# EAGLE board SparkFun_QRE1113_Line_Sensor_Breakout_Digital_Panel_v12 (EAGLE 7.5.0), part 1 of 3
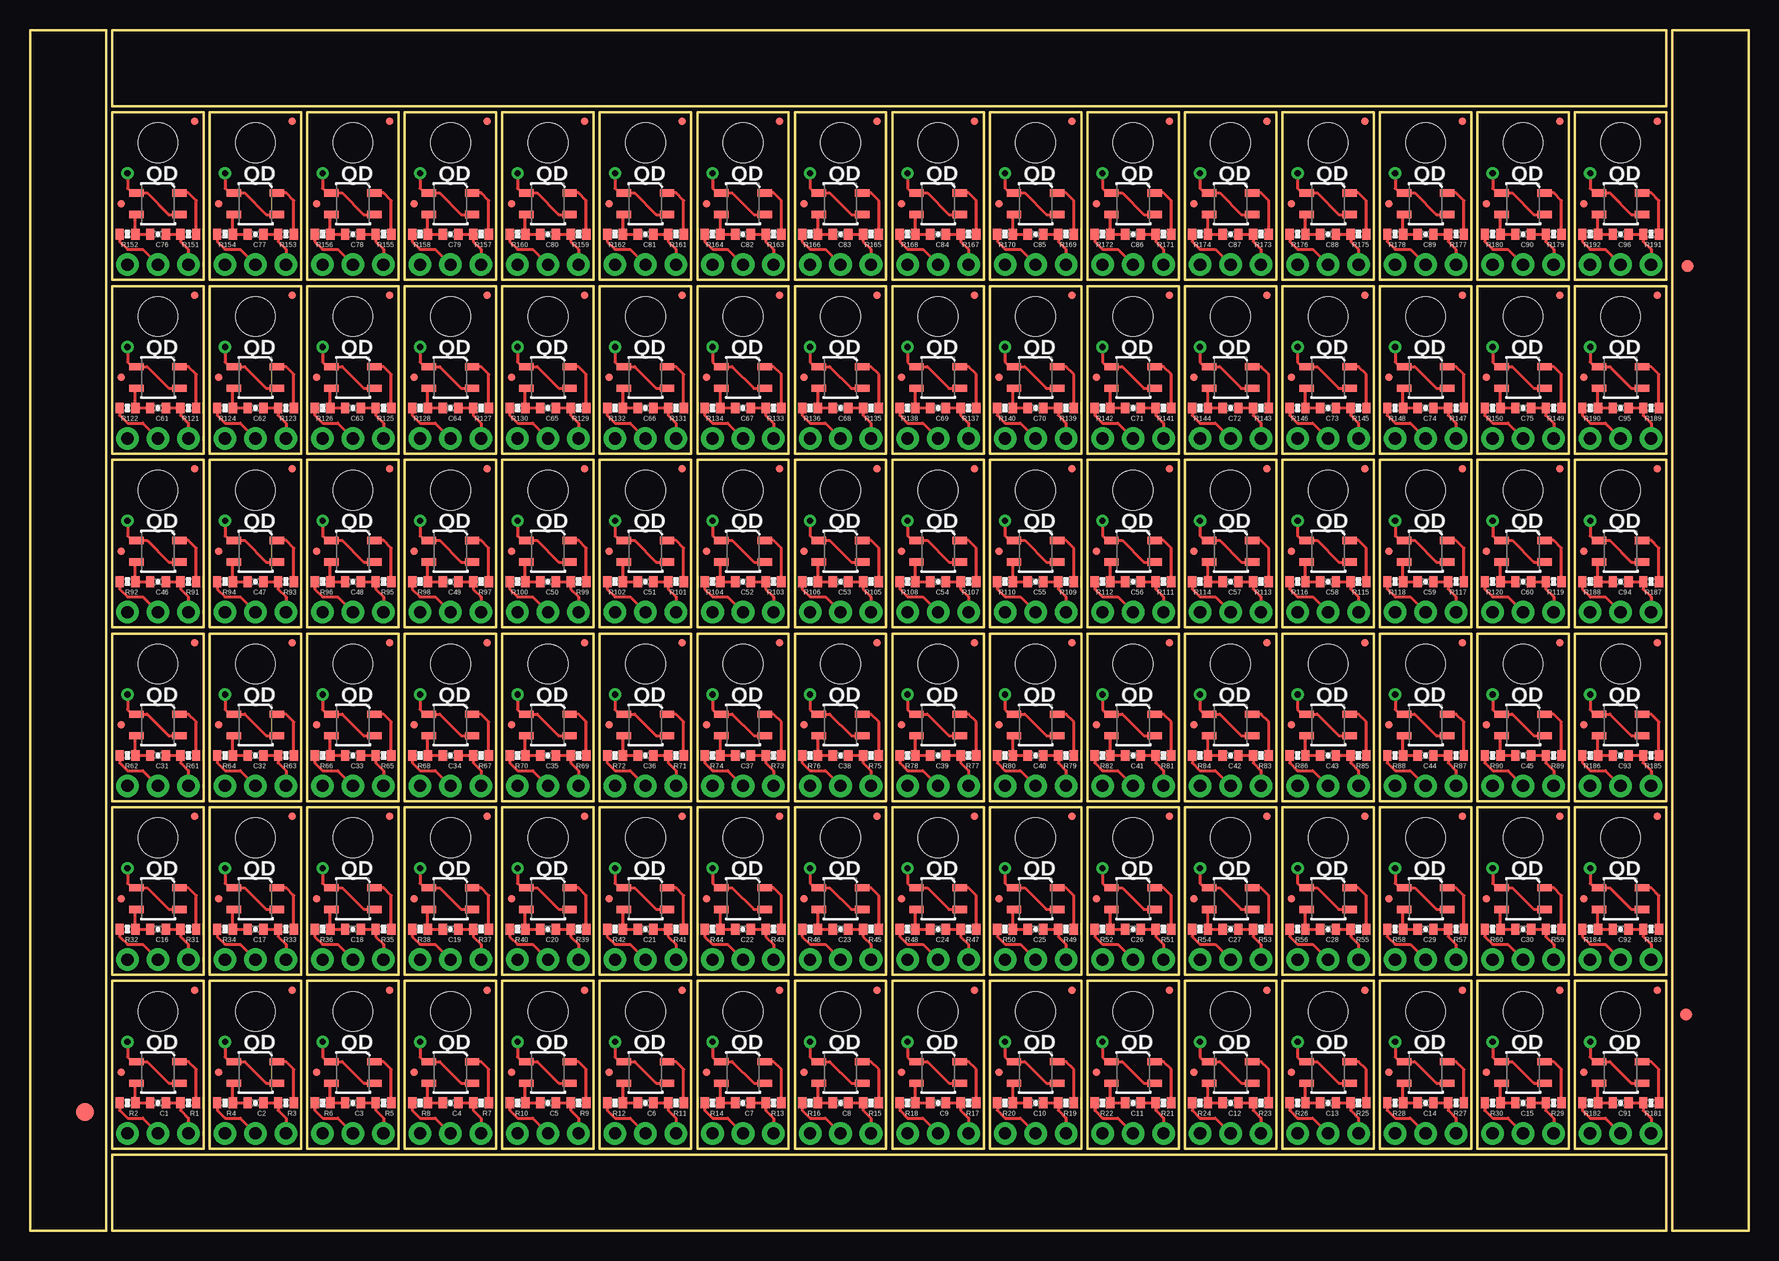
[diagram p0: board, top side]
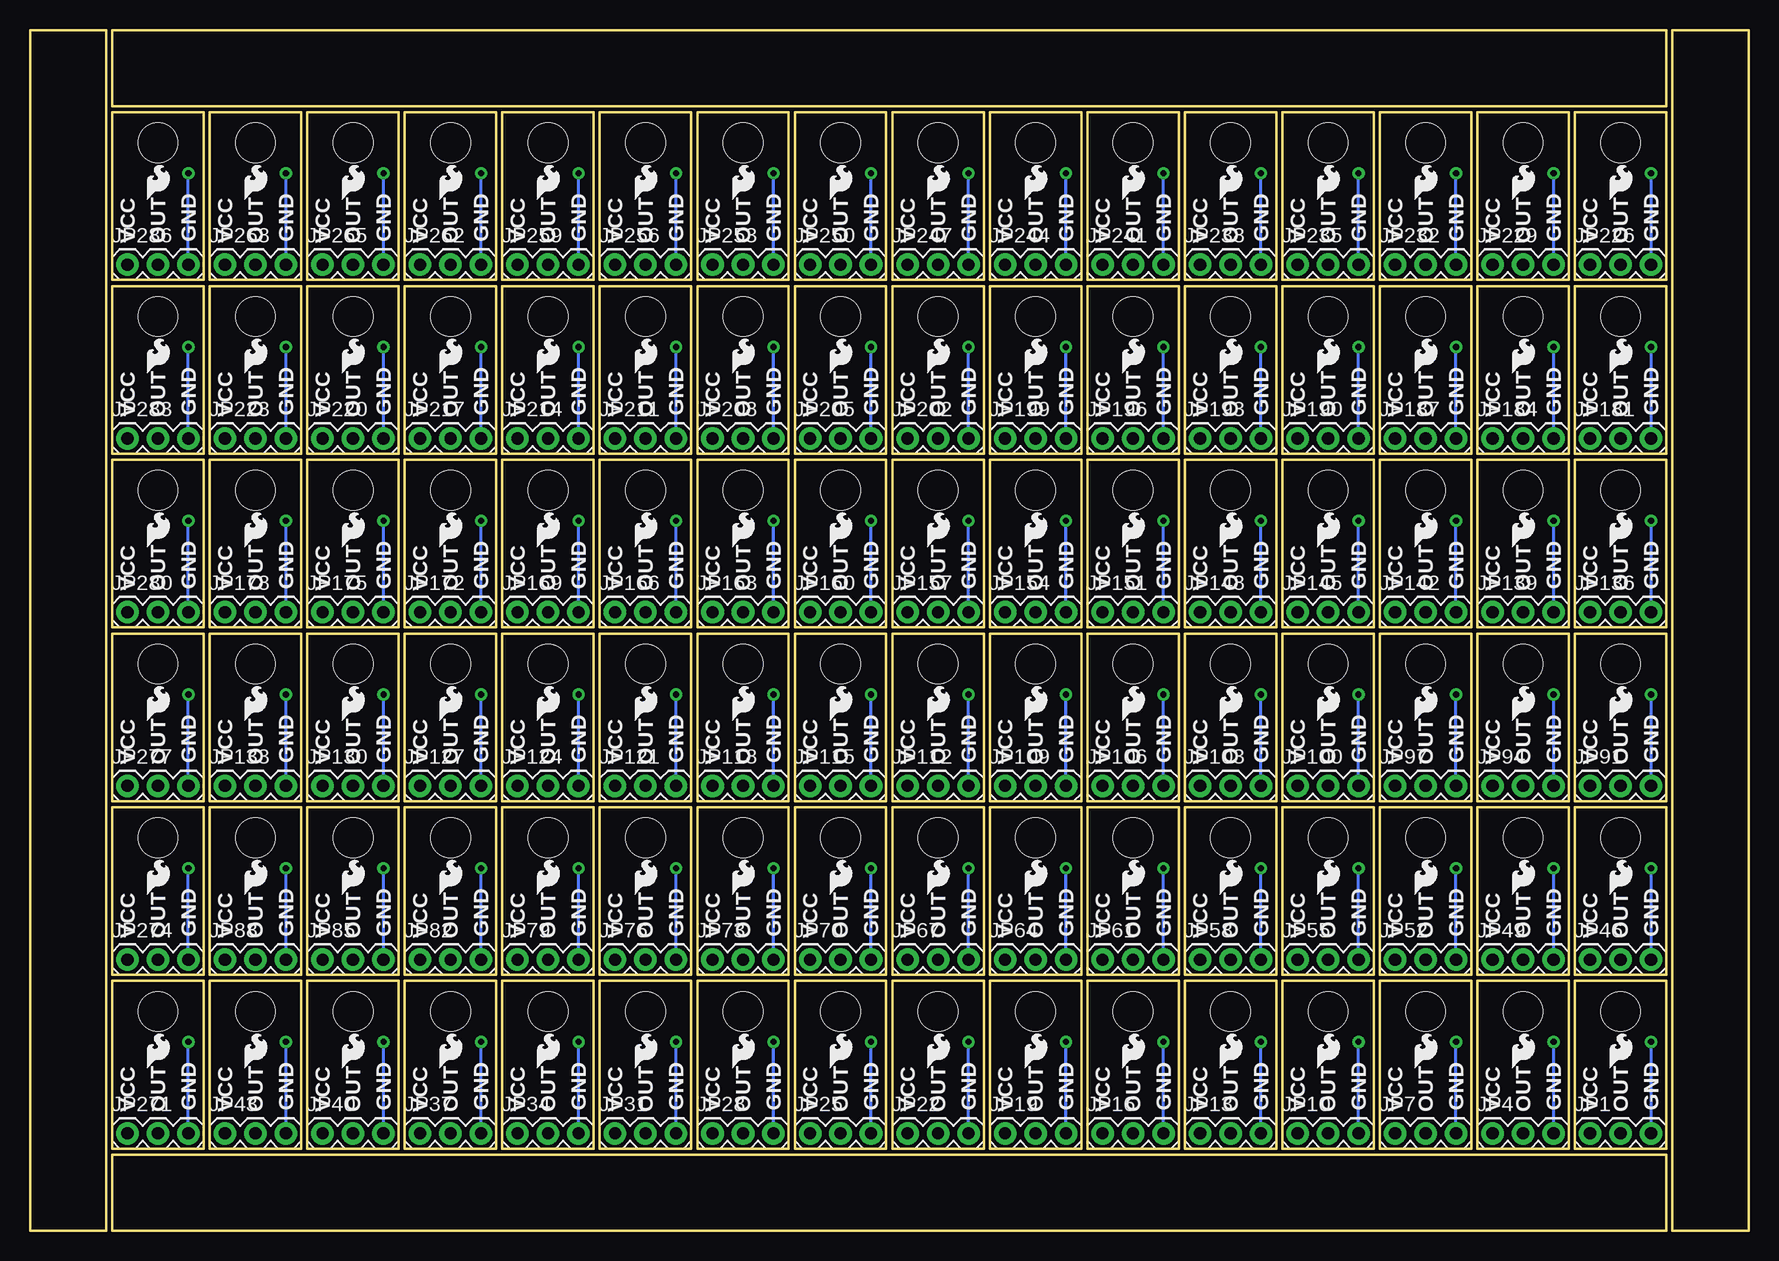
[diagram p1: board, bottom side, seen from below]

Size 143.26 x 100.08 mm. Coordinates in mm from the lower left corner, seen from the top.
Outline: 408 segments
Copper layers (1*16): Top 0.035mm / dielectric 1.5mm / Bottom 0.035mm
Design rules "SparkFun": minimum track width 8mil, minimum drill 20mil, track to track 8mil, track to pad 8mil, pad to pad 8mil, via to via 8mil, smd to smd 8mil, copper to edge 9mil, drill to drill 8mil, minimum pad ring 12mil, minimum via ring 10mil, stop-mask expansion 4mil, vias tented up to drill 20mil, thermal gap 10mil

## Footprints (pad centres in the part's own frame; a part is rotated, then mirrored left to right if it is on the bottom)
0402-CAP = smd 0.7 x 0.9: 1 -0.65,0; 2 0.65,0
FIDUCIAL-1.5X3 = smd 1.5 x 1.5: 1 0,0
FIDUCIAL-1X2 = smd 1 x 1: 1 0,0
MICRO-FIDUCIAL = smd 0.635 x 0.635: 1 0,0
1X03 = drill 1.016 pad 1.88: 1 0,0; 2 2.54,0; 3 5.08,0
STAND-OFF = hole 3.302: 0,0
0402-RES = smd 0.7 x 0.9: 1 -0.65,0; 2 0.65,0
QRE1113 = smd 1.2 x 0.6: 1 -1.8,-0.9; 2 1.8,-0.9; 3 1.8,0.9; 4 -1.8,0.9

## Placement (x,y rotation side)
C1  10nF  [0402-CAP]  10.67,10.67 180 top
C2  10nF  [0402-CAP]  18.8,10.67 180 top
C3  10nF  [0402-CAP]  26.92,10.67 180 top
C4  10nF  [0402-CAP]  35.05,10.67 180 top
C5  10nF  [0402-CAP]  43.18,10.67 180 top
C6  10nF  [0402-CAP]  51.31,10.67 180 top
C7  10nF  [0402-CAP]  59.44,10.67 180 top
C8  10nF  [0402-CAP]  67.56,10.67 180 top
C9  10nF  [0402-CAP]  75.69,10.67 180 top
C10  10nF  [0402-CAP]  83.82,10.67 180 top
C11  10nF  [0402-CAP]  91.95,10.67 180 top
C12  10nF  [0402-CAP]  100.08,10.67 180 top
C13  10nF  [0402-CAP]  108.2,10.67 180 top
C14  10nF  [0402-CAP]  116.33,10.67 180 top
C15  10nF  [0402-CAP]  124.46,10.67 180 top
C16  10nF  [0402-CAP]  10.67,25.15 180 top
C17  10nF  [0402-CAP]  18.8,25.15 180 top
C18  10nF  [0402-CAP]  26.92,25.15 180 top
C19  10nF  [0402-CAP]  35.05,25.15 180 top
C20  10nF  [0402-CAP]  43.18,25.15 180 top
C21  10nF  [0402-CAP]  51.31,25.15 180 top
C22  10nF  [0402-CAP]  59.44,25.15 180 top
C23  10nF  [0402-CAP]  67.56,25.15 180 top
C24  10nF  [0402-CAP]  75.69,25.15 180 top
C25  10nF  [0402-CAP]  83.82,25.15 180 top
C26  10nF  [0402-CAP]  91.95,25.15 180 top
C27  10nF  [0402-CAP]  100.08,25.15 180 top
C28  10nF  [0402-CAP]  108.2,25.15 180 top
C29  10nF  [0402-CAP]  116.33,25.15 180 top
C30  10nF  [0402-CAP]  124.46,25.15 180 top
C31  10nF  [0402-CAP]  10.67,39.62 180 top
C32  10nF  [0402-CAP]  18.8,39.62 180 top
C33  10nF  [0402-CAP]  26.92,39.62 180 top
C34  10nF  [0402-CAP]  35.05,39.62 180 top
C35  10nF  [0402-CAP]  43.18,39.62 180 top
C36  10nF  [0402-CAP]  51.31,39.62 180 top
C37  10nF  [0402-CAP]  59.44,39.62 180 top
C38  10nF  [0402-CAP]  67.56,39.62 180 top
C39  10nF  [0402-CAP]  75.69,39.62 180 top
C40  10nF  [0402-CAP]  83.82,39.62 180 top
C41  10nF  [0402-CAP]  91.95,39.62 180 top
C42  10nF  [0402-CAP]  100.08,39.62 180 top
C43  10nF  [0402-CAP]  108.2,39.62 180 top
C44  10nF  [0402-CAP]  116.33,39.62 180 top
C45  10nF  [0402-CAP]  124.46,39.62 180 top
C46  10nF  [0402-CAP]  10.67,54.1 180 top
C47  10nF  [0402-CAP]  18.8,54.1 180 top
C48  10nF  [0402-CAP]  26.92,54.1 180 top
C49  10nF  [0402-CAP]  35.05,54.1 180 top
C50  10nF  [0402-CAP]  43.18,54.1 180 top
C51  10nF  [0402-CAP]  51.31,54.1 180 top
C52  10nF  [0402-CAP]  59.44,54.1 180 top
C53  10nF  [0402-CAP]  67.56,54.1 180 top
C54  10nF  [0402-CAP]  75.69,54.1 180 top
C55  10nF  [0402-CAP]  83.82,54.1 180 top
C56  10nF  [0402-CAP]  91.95,54.1 180 top
C57  10nF  [0402-CAP]  100.08,54.1 180 top
C58  10nF  [0402-CAP]  108.2,54.1 180 top
C59  10nF  [0402-CAP]  116.33,54.1 180 top
C60  10nF  [0402-CAP]  124.46,54.1 180 top
C61  10nF  [0402-CAP]  10.67,68.58 180 top
C62  10nF  [0402-CAP]  18.8,68.58 180 top
C63  10nF  [0402-CAP]  26.92,68.58 180 top
C64  10nF  [0402-CAP]  35.05,68.58 180 top
C65  10nF  [0402-CAP]  43.18,68.58 180 top
C66  10nF  [0402-CAP]  51.31,68.58 180 top
C67  10nF  [0402-CAP]  59.44,68.58 180 top
C68  10nF  [0402-CAP]  67.56,68.58 180 top
C69  10nF  [0402-CAP]  75.69,68.58 180 top
C70  10nF  [0402-CAP]  83.82,68.58 180 top
C71  10nF  [0402-CAP]  91.95,68.58 180 top
C72  10nF  [0402-CAP]  100.08,68.58 180 top
C73  10nF  [0402-CAP]  108.2,68.58 180 top
C74  10nF  [0402-CAP]  116.33,68.58 180 top
C75  10nF  [0402-CAP]  124.46,68.58 180 top
C76  10nF  [0402-CAP]  10.67,83.06 180 top
C77  10nF  [0402-CAP]  18.8,83.06 180 top
C78  10nF  [0402-CAP]  26.92,83.06 180 top
C79  10nF  [0402-CAP]  35.05,83.06 180 top
C80  10nF  [0402-CAP]  43.18,83.06 180 top
C81  10nF  [0402-CAP]  51.31,83.06 180 top
C82  10nF  [0402-CAP]  59.44,83.06 180 top
C83  10nF  [0402-CAP]  67.56,83.06 180 top
C84  10nF  [0402-CAP]  75.69,83.06 180 top
C85  10nF  [0402-CAP]  83.82,83.06 180 top
C86  10nF  [0402-CAP]  91.95,83.06 180 top
C87  10nF  [0402-CAP]  100.08,83.06 180 top
C88  10nF  [0402-CAP]  108.2,83.06 180 top
C89  10nF  [0402-CAP]  116.33,83.06 180 top
C90  10nF  [0402-CAP]  124.46,83.06 180 top
C91  10nF  [0402-CAP]  132.59,10.67 180 top
C92  10nF  [0402-CAP]  132.59,25.15 180 top
C93  10nF  [0402-CAP]  132.59,39.62 180 top
C94  10nF  [0402-CAP]  132.59,54.1 180 top
C95  10nF  [0402-CAP]  132.59,68.58 180 top
C96  10nF  [0402-CAP]  132.59,83.06 180 top
E$1  [FIDUCIAL-1.5X3]  4.57,9.91 0 top
E$5  [FIDUCIAL-1X2]  138.05,18.03 0 top
E$7  [FIDUCIAL-1X2]  138.18,80.39 90 top
FID1  FIDUCIALUFIDUCIAL  [MICRO-FIDUCIAL]  13.72,20.07 0 top
FID2  FIDUCIALUFIDUCIAL  [MICRO-FIDUCIAL]  7.62,13.21 0 top
FID3  FIDUCIALUFIDUCIAL  [MICRO-FIDUCIAL]  21.84,20.07 0 top
FID4  FIDUCIALUFIDUCIAL  [MICRO-FIDUCIAL]  15.75,13.21 0 top
FID5  FIDUCIALUFIDUCIAL  [MICRO-FIDUCIAL]  29.97,20.07 0 top
FID6  FIDUCIALUFIDUCIAL  [MICRO-FIDUCIAL]  23.88,13.21 0 top
FID7  FIDUCIALUFIDUCIAL  [MICRO-FIDUCIAL]  38.1,20.07 0 top
FID8  FIDUCIALUFIDUCIAL  [MICRO-FIDUCIAL]  32,13.21 0 top
FID9  FIDUCIALUFIDUCIAL  [MICRO-FIDUCIAL]  46.23,20.07 0 top
FID10  FIDUCIALUFIDUCIAL  [MICRO-FIDUCIAL]  40.13,13.21 0 top
FID11  FIDUCIALUFIDUCIAL  [MICRO-FIDUCIAL]  54.36,20.07 0 top
FID12  FIDUCIALUFIDUCIAL  [MICRO-FIDUCIAL]  48.26,13.21 0 top
FID13  FIDUCIALUFIDUCIAL  [MICRO-FIDUCIAL]  62.48,20.07 0 top
FID14  FIDUCIALUFIDUCIAL  [MICRO-FIDUCIAL]  56.39,13.21 0 top
FID15  FIDUCIALUFIDUCIAL  [MICRO-FIDUCIAL]  70.61,20.07 0 top
FID16  FIDUCIALUFIDUCIAL  [MICRO-FIDUCIAL]  64.52,13.21 0 top
FID17  FIDUCIALUFIDUCIAL  [MICRO-FIDUCIAL]  78.74,20.07 0 top
FID18  FIDUCIALUFIDUCIAL  [MICRO-FIDUCIAL]  72.64,13.21 0 top
FID19  FIDUCIALUFIDUCIAL  [MICRO-FIDUCIAL]  86.87,20.07 0 top
FID20  FIDUCIALUFIDUCIAL  [MICRO-FIDUCIAL]  80.77,13.21 0 top
FID21  FIDUCIALUFIDUCIAL  [MICRO-FIDUCIAL]  95,20.07 0 top
FID22  FIDUCIALUFIDUCIAL  [MICRO-FIDUCIAL]  88.9,13.21 0 top
FID23  FIDUCIALUFIDUCIAL  [MICRO-FIDUCIAL]  103.12,20.07 0 top
FID24  FIDUCIALUFIDUCIAL  [MICRO-FIDUCIAL]  97.03,13.21 0 top
FID25  FIDUCIALUFIDUCIAL  [MICRO-FIDUCIAL]  111.25,20.07 0 top
FID26  FIDUCIALUFIDUCIAL  [MICRO-FIDUCIAL]  105.16,13.21 0 top
FID27  FIDUCIALUFIDUCIAL  [MICRO-FIDUCIAL]  119.38,20.07 0 top
FID28  FIDUCIALUFIDUCIAL  [MICRO-FIDUCIAL]  113.28,13.21 0 top
FID29  FIDUCIALUFIDUCIAL  [MICRO-FIDUCIAL]  127.51,20.07 0 top
FID30  FIDUCIALUFIDUCIAL  [MICRO-FIDUCIAL]  121.41,13.21 0 top
FID31  FIDUCIALUFIDUCIAL  [MICRO-FIDUCIAL]  13.72,34.54 0 top
FID32  FIDUCIALUFIDUCIAL  [MICRO-FIDUCIAL]  7.62,27.69 0 top
FID33  FIDUCIALUFIDUCIAL  [MICRO-FIDUCIAL]  21.84,34.54 0 top
FID34  FIDUCIALUFIDUCIAL  [MICRO-FIDUCIAL]  15.75,27.69 0 top
FID35  FIDUCIALUFIDUCIAL  [MICRO-FIDUCIAL]  29.97,34.54 0 top
FID36  FIDUCIALUFIDUCIAL  [MICRO-FIDUCIAL]  23.88,27.69 0 top
FID37  FIDUCIALUFIDUCIAL  [MICRO-FIDUCIAL]  38.1,34.54 0 top
FID38  FIDUCIALUFIDUCIAL  [MICRO-FIDUCIAL]  32,27.69 0 top
FID39  FIDUCIALUFIDUCIAL  [MICRO-FIDUCIAL]  46.23,34.54 0 top
FID40  FIDUCIALUFIDUCIAL  [MICRO-FIDUCIAL]  40.13,27.69 0 top
FID41  FIDUCIALUFIDUCIAL  [MICRO-FIDUCIAL]  54.36,34.54 0 top
FID42  FIDUCIALUFIDUCIAL  [MICRO-FIDUCIAL]  48.26,27.69 0 top
FID43  FIDUCIALUFIDUCIAL  [MICRO-FIDUCIAL]  62.48,34.54 0 top
FID44  FIDUCIALUFIDUCIAL  [MICRO-FIDUCIAL]  56.39,27.69 0 top
FID45  FIDUCIALUFIDUCIAL  [MICRO-FIDUCIAL]  70.61,34.54 0 top
FID46  FIDUCIALUFIDUCIAL  [MICRO-FIDUCIAL]  64.52,27.69 0 top
FID47  FIDUCIALUFIDUCIAL  [MICRO-FIDUCIAL]  78.74,34.54 0 top
FID48  FIDUCIALUFIDUCIAL  [MICRO-FIDUCIAL]  72.64,27.69 0 top
FID49  FIDUCIALUFIDUCIAL  [MICRO-FIDUCIAL]  86.87,34.54 0 top
FID50  FIDUCIALUFIDUCIAL  [MICRO-FIDUCIAL]  80.77,27.69 0 top
FID51  FIDUCIALUFIDUCIAL  [MICRO-FIDUCIAL]  95,34.54 0 top
FID52  FIDUCIALUFIDUCIAL  [MICRO-FIDUCIAL]  88.9,27.69 0 top
FID53  FIDUCIALUFIDUCIAL  [MICRO-FIDUCIAL]  103.12,34.54 0 top
FID54  FIDUCIALUFIDUCIAL  [MICRO-FIDUCIAL]  97.03,27.69 0 top
FID55  FIDUCIALUFIDUCIAL  [MICRO-FIDUCIAL]  111.25,34.54 0 top
FID56  FIDUCIALUFIDUCIAL  [MICRO-FIDUCIAL]  105.16,27.69 0 top
FID57  FIDUCIALUFIDUCIAL  [MICRO-FIDUCIAL]  119.38,34.54 0 top
FID58  FIDUCIALUFIDUCIAL  [MICRO-FIDUCIAL]  113.28,27.69 0 top
FID59  FIDUCIALUFIDUCIAL  [MICRO-FIDUCIAL]  127.51,34.54 0 top
FID60  FIDUCIALUFIDUCIAL  [MICRO-FIDUCIAL]  121.41,27.69 0 top
FID61  FIDUCIALUFIDUCIAL  [MICRO-FIDUCIAL]  13.72,49.02 0 top
FID62  FIDUCIALUFIDUCIAL  [MICRO-FIDUCIAL]  7.62,42.16 0 top
FID63  FIDUCIALUFIDUCIAL  [MICRO-FIDUCIAL]  21.84,49.02 0 top
FID64  FIDUCIALUFIDUCIAL  [MICRO-FIDUCIAL]  15.75,42.16 0 top
FID65  FIDUCIALUFIDUCIAL  [MICRO-FIDUCIAL]  29.97,49.02 0 top
FID66  FIDUCIALUFIDUCIAL  [MICRO-FIDUCIAL]  23.88,42.16 0 top
FID67  FIDUCIALUFIDUCIAL  [MICRO-FIDUCIAL]  38.1,49.02 0 top
FID68  FIDUCIALUFIDUCIAL  [MICRO-FIDUCIAL]  32,42.16 0 top
FID69  FIDUCIALUFIDUCIAL  [MICRO-FIDUCIAL]  46.23,49.02 0 top
FID70  FIDUCIALUFIDUCIAL  [MICRO-FIDUCIAL]  40.13,42.16 0 top
FID71  FIDUCIALUFIDUCIAL  [MICRO-FIDUCIAL]  54.36,49.02 0 top
FID72  FIDUCIALUFIDUCIAL  [MICRO-FIDUCIAL]  48.26,42.16 0 top
FID73  FIDUCIALUFIDUCIAL  [MICRO-FIDUCIAL]  62.48,49.02 0 top
FID74  FIDUCIALUFIDUCIAL  [MICRO-FIDUCIAL]  56.39,42.16 0 top
FID75  FIDUCIALUFIDUCIAL  [MICRO-FIDUCIAL]  70.61,49.02 0 top
FID76  FIDUCIALUFIDUCIAL  [MICRO-FIDUCIAL]  64.52,42.16 0 top
FID77  FIDUCIALUFIDUCIAL  [MICRO-FIDUCIAL]  78.74,49.02 0 top
FID78  FIDUCIALUFIDUCIAL  [MICRO-FIDUCIAL]  72.64,42.16 0 top
FID79  FIDUCIALUFIDUCIAL  [MICRO-FIDUCIAL]  86.87,49.02 0 top
FID80  FIDUCIALUFIDUCIAL  [MICRO-FIDUCIAL]  80.77,42.16 0 top
FID81  FIDUCIALUFIDUCIAL  [MICRO-FIDUCIAL]  95,49.02 0 top
FID82  FIDUCIALUFIDUCIAL  [MICRO-FIDUCIAL]  88.9,42.16 0 top
FID83  FIDUCIALUFIDUCIAL  [MICRO-FIDUCIAL]  103.12,49.02 0 top
FID84  FIDUCIALUFIDUCIAL  [MICRO-FIDUCIAL]  97.03,42.16 0 top
FID85  FIDUCIALUFIDUCIAL  [MICRO-FIDUCIAL]  111.25,49.02 0 top
FID86  FIDUCIALUFIDUCIAL  [MICRO-FIDUCIAL]  105.16,42.16 0 top
FID87  FIDUCIALUFIDUCIAL  [MICRO-FIDUCIAL]  119.38,49.02 0 top
FID88  FIDUCIALUFIDUCIAL  [MICRO-FIDUCIAL]  113.28,42.16 0 top
FID89  FIDUCIALUFIDUCIAL  [MICRO-FIDUCIAL]  127.51,49.02 0 top
FID90  FIDUCIALUFIDUCIAL  [MICRO-FIDUCIAL]  121.41,42.16 0 top
FID91  FIDUCIALUFIDUCIAL  [MICRO-FIDUCIAL]  13.72,63.5 0 top
FID92  FIDUCIALUFIDUCIAL  [MICRO-FIDUCIAL]  7.62,56.64 0 top
FID93  FIDUCIALUFIDUCIAL  [MICRO-FIDUCIAL]  21.84,63.5 0 top
FID94  FIDUCIALUFIDUCIAL  [MICRO-FIDUCIAL]  15.75,56.64 0 top
FID95  FIDUCIALUFIDUCIAL  [MICRO-FIDUCIAL]  29.97,63.5 0 top
FID96  FIDUCIALUFIDUCIAL  [MICRO-FIDUCIAL]  23.88,56.64 0 top
FID97  FIDUCIALUFIDUCIAL  [MICRO-FIDUCIAL]  38.1,63.5 0 top
FID98  FIDUCIALUFIDUCIAL  [MICRO-FIDUCIAL]  32,56.64 0 top
FID99  FIDUCIALUFIDUCIAL  [MICRO-FIDUCIAL]  46.23,63.5 0 top
FID100  FIDUCIALUFIDUCIAL  [MICRO-FIDUCIAL]  40.13,56.64 0 top
FID101  FIDUCIALUFIDUCIAL  [MICRO-FIDUCIAL]  54.36,63.5 0 top
FID102  FIDUCIALUFIDUCIAL  [MICRO-FIDUCIAL]  48.26,56.64 0 top
FID103  FIDUCIALUFIDUCIAL  [MICRO-FIDUCIAL]  62.48,63.5 0 top
FID104  FIDUCIALUFIDUCIAL  [MICRO-FIDUCIAL]  56.39,56.64 0 top
FID105  FIDUCIALUFIDUCIAL  [MICRO-FIDUCIAL]  70.61,63.5 0 top
FID106  FIDUCIALUFIDUCIAL  [MICRO-FIDUCIAL]  64.52,56.64 0 top
FID107  FIDUCIALUFIDUCIAL  [MICRO-FIDUCIAL]  78.74,63.5 0 top
FID108  FIDUCIALUFIDUCIAL  [MICRO-FIDUCIAL]  72.64,56.64 0 top
FID109  FIDUCIALUFIDUCIAL  [MICRO-FIDUCIAL]  86.87,63.5 0 top
FID110  FIDUCIALUFIDUCIAL  [MICRO-FIDUCIAL]  80.77,56.64 0 top
FID111  FIDUCIALUFIDUCIAL  [MICRO-FIDUCIAL]  95,63.5 0 top
FID112  FIDUCIALUFIDUCIAL  [MICRO-FIDUCIAL]  88.9,56.64 0 top
FID113  FIDUCIALUFIDUCIAL  [MICRO-FIDUCIAL]  103.12,63.5 0 top
FID114  FIDUCIALUFIDUCIAL  [MICRO-FIDUCIAL]  97.03,56.64 0 top
FID115  FIDUCIALUFIDUCIAL  [MICRO-FIDUCIAL]  111.25,63.5 0 top
FID116  FIDUCIALUFIDUCIAL  [MICRO-FIDUCIAL]  105.16,56.64 0 top
FID117  FIDUCIALUFIDUCIAL  [MICRO-FIDUCIAL]  119.38,63.5 0 top
FID118  FIDUCIALUFIDUCIAL  [MICRO-FIDUCIAL]  113.28,56.64 0 top
FID119  FIDUCIALUFIDUCIAL  [MICRO-FIDUCIAL]  127.51,63.5 0 top
FID120  FIDUCIALUFIDUCIAL  [MICRO-FIDUCIAL]  121.41,56.64 0 top
FID121  FIDUCIALUFIDUCIAL  [MICRO-FIDUCIAL]  13.72,77.98 0 top
FID122  FIDUCIALUFIDUCIAL  [MICRO-FIDUCIAL]  7.62,71.12 0 top
FID123  FIDUCIALUFIDUCIAL  [MICRO-FIDUCIAL]  21.84,77.98 0 top
FID124  FIDUCIALUFIDUCIAL  [MICRO-FIDUCIAL]  15.75,71.12 0 top
FID125  FIDUCIALUFIDUCIAL  [MICRO-FIDUCIAL]  29.97,77.98 0 top
FID126  FIDUCIALUFIDUCIAL  [MICRO-FIDUCIAL]  23.88,71.12 0 top
FID127  FIDUCIALUFIDUCIAL  [MICRO-FIDUCIAL]  38.1,77.98 0 top
FID128  FIDUCIALUFIDUCIAL  [MICRO-FIDUCIAL]  32,71.12 0 top
FID129  FIDUCIALUFIDUCIAL  [MICRO-FIDUCIAL]  46.23,77.98 0 top
FID130  FIDUCIALUFIDUCIAL  [MICRO-FIDUCIAL]  40.13,71.12 0 top
FID131  FIDUCIALUFIDUCIAL  [MICRO-FIDUCIAL]  54.36,77.98 0 top
FID132  FIDUCIALUFIDUCIAL  [MICRO-FIDUCIAL]  48.26,71.12 0 top
FID133  FIDUCIALUFIDUCIAL  [MICRO-FIDUCIAL]  62.48,77.98 0 top
FID134  FIDUCIALUFIDUCIAL  [MICRO-FIDUCIAL]  56.39,71.12 0 top
FID135  FIDUCIALUFIDUCIAL  [MICRO-FIDUCIAL]  70.61,77.98 0 top
FID136  FIDUCIALUFIDUCIAL  [MICRO-FIDUCIAL]  64.52,71.12 0 top
FID137  FIDUCIALUFIDUCIAL  [MICRO-FIDUCIAL]  78.74,77.98 0 top
FID138  FIDUCIALUFIDUCIAL  [MICRO-FIDUCIAL]  72.64,71.12 0 top
FID139  FIDUCIALUFIDUCIAL  [MICRO-FIDUCIAL]  86.87,77.98 0 top
FID140  FIDUCIALUFIDUCIAL  [MICRO-FIDUCIAL]  80.77,71.12 0 top
FID141  FIDUCIALUFIDUCIAL  [MICRO-FIDUCIAL]  95,77.98 0 top
FID142  FIDUCIALUFIDUCIAL  [MICRO-FIDUCIAL]  88.9,71.12 0 top
FID143  FIDUCIALUFIDUCIAL  [MICRO-FIDUCIAL]  103.12,77.98 0 top
FID144  FIDUCIALUFIDUCIAL  [MICRO-FIDUCIAL]  97.03,71.12 0 top
FID145  FIDUCIALUFIDUCIAL  [MICRO-FIDUCIAL]  111.25,77.98 0 top
FID146  FIDUCIALUFIDUCIAL  [MICRO-FIDUCIAL]  105.16,71.12 0 top
FID147  FIDUCIALUFIDUCIAL  [MICRO-FIDUCIAL]  119.38,77.98 0 top
FID148  FIDUCIALUFIDUCIAL  [MICRO-FIDUCIAL]  113.28,71.12 0 top
FID149  FIDUCIALUFIDUCIAL  [MICRO-FIDUCIAL]  127.51,77.98 0 top
FID150  FIDUCIALUFIDUCIAL  [MICRO-FIDUCIAL]  121.41,71.12 0 top
FID151  FIDUCIALUFIDUCIAL  [MICRO-FIDUCIAL]  13.72,92.46 0 top
FID152  FIDUCIALUFIDUCIAL  [MICRO-FIDUCIAL]  7.62,85.6 0 top
FID153  FIDUCIALUFIDUCIAL  [MICRO-FIDUCIAL]  21.84,92.46 0 top
FID154  FIDUCIALUFIDUCIAL  [MICRO-FIDUCIAL]  15.75,85.6 0 top
FID155  FIDUCIALUFIDUCIAL  [MICRO-FIDUCIAL]  29.97,92.46 0 top
FID156  FIDUCIALUFIDUCIAL  [MICRO-FIDUCIAL]  23.88,85.6 0 top
FID157  FIDUCIALUFIDUCIAL  [MICRO-FIDUCIAL]  38.1,92.46 0 top
FID158  FIDUCIALUFIDUCIAL  [MICRO-FIDUCIAL]  32,85.6 0 top
FID159  FIDUCIALUFIDUCIAL  [MICRO-FIDUCIAL]  46.23,92.46 0 top
FID160  FIDUCIALUFIDUCIAL  [MICRO-FIDUCIAL]  40.13,85.6 0 top
FID161  FIDUCIALUFIDUCIAL  [MICRO-FIDUCIAL]  54.36,92.46 0 top
FID162  FIDUCIALUFIDUCIAL  [MICRO-FIDUCIAL]  48.26,85.6 0 top
FID163  FIDUCIALUFIDUCIAL  [MICRO-FIDUCIAL]  62.48,92.46 0 top
FID164  FIDUCIALUFIDUCIAL  [MICRO-FIDUCIAL]  56.39,85.6 0 top
FID165  FIDUCIALUFIDUCIAL  [MICRO-FIDUCIAL]  70.61,92.46 0 top
FID166  FIDUCIALUFIDUCIAL  [MICRO-FIDUCIAL]  64.52,85.6 0 top
FID167  FIDUCIALUFIDUCIAL  [MICRO-FIDUCIAL]  78.74,92.46 0 top
FID168  FIDUCIALUFIDUCIAL  [MICRO-FIDUCIAL]  72.64,85.6 0 top
FID169  FIDUCIALUFIDUCIAL  [MICRO-FIDUCIAL]  86.87,92.46 0 top
FID170  FIDUCIALUFIDUCIAL  [MICRO-FIDUCIAL]  80.77,85.6 0 top
FID171  FIDUCIALUFIDUCIAL  [MICRO-FIDUCIAL]  95,92.46 0 top
FID172  FIDUCIALUFIDUCIAL  [MICRO-FIDUCIAL]  88.9,85.6 0 top
FID173  FIDUCIALUFIDUCIAL  [MICRO-FIDUCIAL]  103.12,92.46 0 top
FID174  FIDUCIALUFIDUCIAL  [MICRO-FIDUCIAL]  97.03,85.6 0 top
FID175  FIDUCIALUFIDUCIAL  [MICRO-FIDUCIAL]  111.25,92.46 0 top
FID176  FIDUCIALUFIDUCIAL  [MICRO-FIDUCIAL]  105.16,85.6 0 top
FID177  FIDUCIALUFIDUCIAL  [MICRO-FIDUCIAL]  119.38,92.46 0 top
FID178  FIDUCIALUFIDUCIAL  [MICRO-FIDUCIAL]  113.28,85.6 0 top
FID179  FIDUCIALUFIDUCIAL  [MICRO-FIDUCIAL]  127.51,92.46 0 top
FID180  FIDUCIALUFIDUCIAL  [MICRO-FIDUCIAL]  121.41,85.6 0 top
FID181  FIDUCIALUFIDUCIAL  [MICRO-FIDUCIAL]  135.64,20.07 0 top
FID182  FIDUCIALUFIDUCIAL  [MICRO-FIDUCIAL]  129.54,13.21 0 top
FID183  FIDUCIALUFIDUCIAL  [MICRO-FIDUCIAL]  135.64,34.54 0 top
FID184  FIDUCIALUFIDUCIAL  [MICRO-FIDUCIAL]  129.54,27.69 0 top
FID185  FIDUCIALUFIDUCIAL  [MICRO-FIDUCIAL]  135.64,49.02 0 top
FID186  FIDUCIALUFIDUCIAL  [MICRO-FIDUCIAL]  129.54,42.16 0 top
FID187  FIDUCIALUFIDUCIAL  [MICRO-FIDUCIAL]  135.64,63.5 0 top
FID188  FIDUCIALUFIDUCIAL  [MICRO-FIDUCIAL]  129.54,56.64 0 top
FID189  FIDUCIALUFIDUCIAL  [MICRO-FIDUCIAL]  135.64,77.98 0 top
FID190  FIDUCIALUFIDUCIAL  [MICRO-FIDUCIAL]  129.54,71.12 0 top
FID191  FIDUCIALUFIDUCIAL  [MICRO-FIDUCIAL]  135.64,92.46 0 top
FID192  FIDUCIALUFIDUCIAL  [MICRO-FIDUCIAL]  129.54,85.6 0 top
JP1  [1X03]  13.21,8.13 0 bottom
JP2  LOGO-SFESK  [SFE-LOGO-FLAME]  11.56,13.59 0 bottom
JP3  STAND-OFF  [STAND-OFF]  10.67,18.29 0 top
JP4  [1X03]  21.34,8.13 0 bottom
JP5  LOGO-SFESK  [SFE-LOGO-FLAME]  19.68,13.59 0 bottom
JP6  STAND-OFF  [STAND-OFF]  18.8,18.29 0 top
JP7  [1X03]  29.46,8.13 0 bottom
JP8  LOGO-SFESK  [SFE-LOGO-FLAME]  27.81,13.59 0 bottom
JP9  STAND-OFF  [STAND-OFF]  26.92,18.29 0 top
JP10  [1X03]  37.59,8.13 0 bottom
JP11  LOGO-SFESK  [SFE-LOGO-FLAME]  35.94,13.59 0 bottom
JP12  STAND-OFF  [STAND-OFF]  35.05,18.29 0 top
JP13  [1X03]  45.72,8.13 0 bottom
JP14  LOGO-SFESK  [SFE-LOGO-FLAME]  44.07,13.59 0 bottom
JP15  STAND-OFF  [STAND-OFF]  43.18,18.29 0 top
JP16  [1X03]  53.85,8.13 0 bottom
JP17  LOGO-SFESK  [SFE-LOGO-FLAME]  52.2,13.59 0 bottom
JP18  STAND-OFF  [STAND-OFF]  51.31,18.29 0 top
JP19  [1X03]  61.98,8.13 0 bottom
JP20  LOGO-SFESK  [SFE-LOGO-FLAME]  60.33,13.59 0 bottom
JP21  STAND-OFF  [STAND-OFF]  59.44,18.29 0 top
JP22  [1X03]  70.1,8.13 0 bottom
JP23  LOGO-SFESK  [SFE-LOGO-FLAME]  68.45,13.59 0 bottom
JP24  STAND-OFF  [STAND-OFF]  67.56,18.29 0 top
JP25  [1X03]  78.23,8.13 0 bottom
JP26  LOGO-SFESK  [SFE-LOGO-FLAME]  76.58,13.59 0 bottom
JP27  STAND-OFF  [STAND-OFF]  75.69,18.29 0 top
JP28  [1X03]  86.36,8.13 0 bottom
JP29  LOGO-SFESK  [SFE-LOGO-FLAME]  84.71,13.59 0 bottom
JP30  STAND-OFF  [STAND-OFF]  83.82,18.29 0 top
JP31  [1X03]  94.49,8.13 0 bottom
JP32  LOGO-SFESK  [SFE-LOGO-FLAME]  92.84,13.59 0 bottom
JP33  STAND-OFF  [STAND-OFF]  91.95,18.29 0 top
JP34  [1X03]  102.62,8.13 0 bottom
JP35  LOGO-SFESK  [SFE-LOGO-FLAME]  100.97,13.59 0 bottom
JP36  STAND-OFF  [STAND-OFF]  100.08,18.29 0 top
JP37  [1X03]  110.74,8.13 0 bottom
JP38  LOGO-SFESK  [SFE-LOGO-FLAME]  109.09,13.59 0 bottom
JP39  STAND-OFF  [STAND-OFF]  108.2,18.29 0 top
JP40  [1X03]  118.87,8.13 0 bottom
JP41  LOGO-SFESK  [SFE-LOGO-FLAME]  117.22,13.59 0 bottom
JP42  STAND-OFF  [STAND-OFF]  116.33,18.29 0 top
JP43  [1X03]  127,8.13 0 bottom
JP44  LOGO-SFESK  [SFE-LOGO-FLAME]  125.35,13.59 0 bottom
JP45  STAND-OFF  [STAND-OFF]  124.46,18.29 0 top
JP46  [1X03]  13.21,22.61 0 bottom
JP47  LOGO-SFESK  [SFE-LOGO-FLAME]  11.56,28.07 0 bottom
JP48  STAND-OFF  [STAND-OFF]  10.67,32.77 0 top
JP49  [1X03]  21.34,22.61 0 bottom
JP50  LOGO-SFESK  [SFE-LOGO-FLAME]  19.68,28.07 0 bottom
JP51  STAND-OFF  [STAND-OFF]  18.8,32.77 0 top
JP52  [1X03]  29.46,22.61 0 bottom
JP53  LOGO-SFESK  [SFE-LOGO-FLAME]  27.81,28.07 0 bottom
JP54  STAND-OFF  [STAND-OFF]  26.92,32.77 0 top
JP55  [1X03]  37.59,22.61 0 bottom
JP56  LOGO-SFESK  [SFE-LOGO-FLAME]  35.94,28.07 0 bottom
JP57  STAND-OFF  [STAND-OFF]  35.05,32.77 0 top
JP58  [1X03]  45.72,22.61 0 bottom
JP59  LOGO-SFESK  [SFE-LOGO-FLAME]  44.07,28.07 0 bottom
JP60  STAND-OFF  [STAND-OFF]  43.18,32.77 0 top
JP61  [1X03]  53.85,22.61 0 bottom
JP62  LOGO-SFESK  [SFE-LOGO-FLAME]  52.2,28.07 0 bottom
JP63  STAND-OFF  [STAND-OFF]  51.31,32.77 0 top
JP64  [1X03]  61.98,22.61 0 bottom
JP65  LOGO-SFESK  [SFE-LOGO-FLAME]  60.33,28.07 0 bottom
JP66  STAND-OFF  [STAND-OFF]  59.44,32.77 0 top
JP67  [1X03]  70.1,22.61 0 bottom
JP68  LOGO-SFESK  [SFE-LOGO-FLAME]  68.45,28.07 0 bottom
JP69  STAND-OFF  [STAND-OFF]  67.56,32.77 0 top
JP70  [1X03]  78.23,22.61 0 bottom
JP71  LOGO-SFESK  [SFE-LOGO-FLAME]  76.58,28.07 0 bottom
JP72  STAND-OFF  [STAND-OFF]  75.69,32.77 0 top
JP73  [1X03]  86.36,22.61 0 bottom
JP74  LOGO-SFESK  [SFE-LOGO-FLAME]  84.71,28.07 0 bottom
JP75  STAND-OFF  [STAND-OFF]  83.82,32.77 0 top
JP76  [1X03]  94.49,22.61 0 bottom
JP77  LOGO-SFESK  [SFE-LOGO-FLAME]  92.84,28.07 0 bottom
JP78  STAND-OFF  [STAND-OFF]  91.95,32.77 0 top
JP79  [1X03]  102.62,22.61 0 bottom
JP80  LOGO-SFESK  [SFE-LOGO-FLAME]  100.97,28.07 0 bottom
JP81  STAND-OFF  [STAND-OFF]  100.08,32.77 0 top
JP82  [1X03]  110.74,22.61 0 bottom
JP83  LOGO-SFESK  [SFE-LOGO-FLAME]  109.09,28.07 0 bottom
JP84  STAND-OFF  [STAND-OFF]  108.2,32.77 0 top
JP85  [1X03]  118.87,22.61 0 bottom
JP86  LOGO-SFESK  [SFE-LOGO-FLAME]  117.22,28.07 0 bottom
JP87  STAND-OFF  [STAND-OFF]  116.33,32.77 0 top
JP88  [1X03]  127,22.61 0 bottom
JP89  LOGO-SFESK  [SFE-LOGO-FLAME]  125.35,28.07 0 bottom
JP90  STAND-OFF  [STAND-OFF]  124.46,32.77 0 top
JP91  [1X03]  13.21,37.08 0 bottom
JP92  LOGO-SFESK  [SFE-LOGO-FLAME]  11.56,42.55 0 bottom
JP93  STAND-OFF  [STAND-OFF]  10.67,47.24 0 top
JP94  [1X03]  21.34,37.08 0 bottom
JP95  LOGO-SFESK  [SFE-LOGO-FLAME]  19.68,42.55 0 bottom
JP96  STAND-OFF  [STAND-OFF]  18.8,47.24 0 top
JP97  [1X03]  29.46,37.08 0 bottom
JP98  LOGO-SFESK  [SFE-LOGO-FLAME]  27.81,42.55 0 bottom
JP99  STAND-OFF  [STAND-OFF]  26.92,47.24 0 top
JP100  [1X03]  37.59,37.08 0 bottom
JP101  LOGO-SFESK  [SFE-LOGO-FLAME]  35.94,42.55 0 bottom
JP102  STAND-OFF  [STAND-OFF]  35.05,47.24 0 top
JP103  [1X03]  45.72,37.08 0 bottom
JP104  LOGO-SFESK  [SFE-LOGO-FLAME]  44.07,42.55 0 bottom
JP105  STAND-OFF  [STAND-OFF]  43.18,47.24 0 top
JP106  [1X03]  53.85,37.08 0 bottom
JP107  LOGO-SFESK  [SFE-LOGO-FLAME]  52.2,42.55 0 bottom
JP108  STAND-OFF  [STAND-OFF]  51.31,47.24 0 top
JP109  [1X03]  61.98,37.08 0 bottom
JP110  LOGO-SFESK  [SFE-LOGO-FLAME]  60.33,42.55 0 bottom
JP111  STAND-OFF  [STAND-OFF]  59.44,47.24 0 top
JP112  [1X03]  70.1,37.08 0 bottom
JP113  LOGO-SFESK  [SFE-LOGO-FLAME]  68.45,42.55 0 bottom
JP114  STAND-OFF  [STAND-OFF]  67.56,47.24 0 top
JP115  [1X03]  78.23,37.08 0 bottom
JP116  LOGO-SFESK  [SFE-LOGO-FLAME]  76.58,42.55 0 bottom
JP117  STAND-OFF  [STAND-OFF]  75.69,47.24 0 top
JP118  [1X03]  86.36,37.08 0 bottom
JP119  LOGO-SFESK  [SFE-LOGO-FLAME]  84.71,42.55 0 bottom
JP120  STAND-OFF  [STAND-OFF]  83.82,47.24 0 top
JP121  [1X03]  94.49,37.08 0 bottom
JP122  LOGO-SFESK  [SFE-LOGO-FLAME]  92.84,42.55 0 bottom
JP123  STAND-OFF  [STAND-OFF]  91.95,47.24 0 top
JP124  [1X03]  102.62,37.08 0 bottom
JP125  LOGO-SFESK  [SFE-LOGO-FLAME]  100.97,42.55 0 bottom
JP126  STAND-OFF  [STAND-OFF]  100.08,47.24 0 top
JP127  [1X03]  110.74,37.08 0 bottom
JP128  LOGO-SFESK  [SFE-LOGO-FLAME]  109.09,42.55 0 bottom
JP129  STAND-OFF  [STAND-OFF]  108.2,47.24 0 top
JP130  [1X03]  118.87,37.08 0 bottom
JP131  LOGO-SFESK  [SFE-LOGO-FLAME]  117.22,42.55 0 bottom
JP132  STAND-OFF  [STAND-OFF]  116.33,47.24 0 top
JP133  [1X03]  127,37.08 0 bottom
JP134  LOGO-SFESK  [SFE-LOGO-FLAME]  125.35,42.55 0 bottom
JP135  STAND-OFF  [STAND-OFF]  124.46,47.24 0 top
JP136  [1X03]  13.21,51.56 0 bottom
JP137  LOGO-SFESK  [SFE-LOGO-FLAME]  11.56,57.02 0 bottom
JP138  STAND-OFF  [STAND-OFF]  10.67,61.72 0 top
JP139  [1X03]  21.34,51.56 0 bottom
JP140  LOGO-SFESK  [SFE-LOGO-FLAME]  19.68,57.02 0 bottom
JP141  STAND-OFF  [STAND-OFF]  18.8,61.72 0 top
JP142  [1X03]  29.46,51.56 0 bottom
JP143  LOGO-SFESK  [SFE-LOGO-FLAME]  27.81,57.02 0 bottom
JP144  STAND-OFF  [STAND-OFF]  26.92,61.72 0 top
JP145  [1X03]  37.59,51.56 0 bottom
JP146  LOGO-SFESK  [SFE-LOGO-FLAME]  35.94,57.02 0 bottom
JP147  STAND-OFF  [STAND-OFF]  35.05,61.72 0 top
JP148  [1X03]  45.72,51.56 0 bottom
JP149  LOGO-SFESK  [SFE-LOGO-FLAME]  44.07,57.02 0 bottom
JP150  STAND-OFF  [STAND-OFF]  43.18,61.72 0 top
JP151  [1X03]  53.85,51.56 0 bottom
JP152  LOGO-SFESK  [SFE-LOGO-FLAME]  52.2,57.02 0 bottom
JP153  STAND-OFF  [STAND-OFF]  51.31,61.72 0 top
JP154  [1X03]  61.98,51.56 0 bottom
JP155  LOGO-SFESK  [SFE-LOGO-FLAME]  60.33,57.02 0 bottom
JP156  STAND-OFF  [STAND-OFF]  59.44,61.72 0 top
JP157  [1X03]  70.1,51.56 0 bottom
JP158  LOGO-SFESK  [SFE-LOGO-FLAME]  68.45,57.02 0 bottom
JP159  STAND-OFF  [STAND-OFF]  67.56,61.72 0 top
JP160  [1X03]  78.23,51.56 0 bottom
JP161  LOGO-SFESK  [SFE-LOGO-FLAME]  76.58,57.02 0 bottom
JP162  STAND-OFF  [STAND-OFF]  75.69,61.72 0 top
JP163  [1X03]  86.36,51.56 0 bottom
JP164  LOGO-SFESK  [SFE-LOGO-FLAME]  84.71,57.02 0 bottom
JP165  STAND-OFF  [STAND-OFF]  83.82,61.72 0 top
JP166  [1X03]  94.49,51.56 0 bottom
JP167  LOGO-SFESK  [SFE-LOGO-FLAME]  92.84,57.02 0 bottom
JP168  STAND-OFF  [STAND-OFF]  91.95,61.72 0 top
JP169  [1X03]  102.62,51.56 0 bottom
JP170  LOGO-SFESK  [SFE-LOGO-FLAME]  100.97,57.02 0 bottom
JP171  STAND-OFF  [STAND-OFF]  100.08,61.72 0 top
JP172  [1X03]  110.74,51.56 0 bottom
JP173  LOGO-SFESK  [SFE-LOGO-FLAME]  109.09,57.02 0 bottom
JP174  STAND-OFF  [STAND-OFF]  108.2,61.72 0 top
JP175  [1X03]  118.87,51.56 0 bottom
JP176  LOGO-SFESK  [SFE-LOGO-FLAME]  117.22,57.02 0 bottom
JP177  STAND-OFF  [STAND-OFF]  116.33,61.72 0 top
JP178  [1X03]  127,51.56 0 bottom
JP179  LOGO-SFESK  [SFE-LOGO-FLAME]  125.35,57.02 0 bottom
JP180  STAND-OFF  [STAND-OFF]  124.46,61.72 0 top
JP181  [1X03]  13.21,66.04 0 bottom
JP182  LOGO-SFESK  [SFE-LOGO-FLAME]  11.56,71.5 0 bottom
JP183  STAND-OFF  [STAND-OFF]  10.67,76.2 0 top
JP184  [1X03]  21.34,66.04 0 bottom
JP185  LOGO-SFESK  [SFE-LOGO-FLAME]  19.68,71.5 0 bottom
JP186  STAND-OFF  [STAND-OFF]  18.8,76.2 0 top
JP187  [1X03]  29.46,66.04 0 bottom
JP188  LOGO-SFESK  [SFE-LOGO-FLAME]  27.81,71.5 0 bottom
JP189  STAND-OFF  [STAND-OFF]  26.92,76.2 0 top
JP190  [1X03]  37.59,66.04 0 bottom
JP191  LOGO-SFESK  [SFE-LOGO-FLAME]  35.94,71.5 0 bottom
JP192  STAND-OFF  [STAND-OFF]  35.05,76.2 0 top
JP193  [1X03]  45.72,66.04 0 bottom
JP194  LOGO-SFESK  [SFE-LOGO-FLAME]  44.07,71.5 0 bottom
JP195  STAND-OFF  [STAND-OFF]  43.18,76.2 0 top
JP196  [1X03]  53.85,66.04 0 bottom
JP197  LOGO-SFESK  [SFE-LOGO-FLAME]  52.2,71.5 0 bottom
JP198  STAND-OFF  [STAND-OFF]  51.31,76.2 0 top
JP199  [1X03]  61.98,66.04 0 bottom
JP200  LOGO-SFESK  [SFE-LOGO-FLAME]  60.33,71.5 0 bottom
JP201  STAND-OFF  [STAND-OFF]  59.44,76.2 0 top
JP202  [1X03]  70.1,66.04 0 bottom
JP203  LOGO-SFESK  [SFE-LOGO-FLAME]  68.45,71.5 0 bottom
JP204  STAND-OFF  [STAND-OFF]  67.56,76.2 0 top
JP205  [1X03]  78.23,66.04 0 bottom
JP206  LOGO-SFESK  [SFE-LOGO-FLAME]  76.58,71.5 0 bottom
JP207  STAND-OFF  [STAND-OFF]  75.69,76.2 0 top
JP208  [1X03]  86.36,66.04 0 bottom
JP209  LOGO-SFESK  [SFE-LOGO-FLAME]  84.71,71.5 0 bottom
JP210  STAND-OFF  [STAND-OFF]  83.82,76.2 0 top
JP211  [1X03]  94.49,66.04 0 bottom
JP212  LOGO-SFESK  [SFE-LOGO-FLAME]  92.84,71.5 0 bottom
JP213  STAND-OFF  [STAND-OFF]  91.95,76.2 0 top
JP214  [1X03]  102.62,66.04 0 bottom
JP215  LOGO-SFESK  [SFE-LOGO-FLAME]  100.97,71.5 0 bottom
JP216  STAND-OFF  [STAND-OFF]  100.08,76.2 0 top
JP217  [1X03]  110.74,66.04 0 bottom
JP218  LOGO-SFESK  [SFE-LOGO-FLAME]  109.09,71.5 0 bottom
JP219  STAND-OFF  [STAND-OFF]  108.2,76.2 0 top
JP220  [1X03]  118.87,66.04 0 bottom
JP221  LOGO-SFESK  [SFE-LOGO-FLAME]  117.22,71.5 0 bottom
JP222  STAND-OFF  [STAND-OFF]  116.33,76.2 0 top
JP223  [1X03]  127,66.04 0 bottom
JP224  LOGO-SFESK  [SFE-LOGO-FLAME]  125.35,71.5 0 bottom
JP225  STAND-OFF  [STAND-OFF]  124.46,76.2 0 top
JP226  [1X03]  13.21,80.52 0 bottom
JP227  LOGO-SFESK  [SFE-LOGO-FLAME]  11.56,85.98 0 bottom
JP228  STAND-OFF  [STAND-OFF]  10.67,90.68 0 top
JP229  [1X03]  21.34,80.52 0 bottom
JP230  LOGO-SFESK  [SFE-LOGO-FLAME]  19.68,85.98 0 bottom
JP231  STAND-OFF  [STAND-OFF]  18.8,90.68 0 top
JP232  [1X03]  29.46,80.52 0 bottom
JP233  LOGO-SFESK  [SFE-LOGO-FLAME]  27.81,85.98 0 bottom
JP234  STAND-OFF  [STAND-OFF]  26.92,90.68 0 top
JP235  [1X03]  37.59,80.52 0 bottom
JP236  LOGO-SFESK  [SFE-LOGO-FLAME]  35.94,85.98 0 bottom
JP237  STAND-OFF  [STAND-OFF]  35.05,90.68 0 top
JP238  [1X03]  45.72,80.52 0 bottom
JP239  LOGO-SFESK  [SFE-LOGO-FLAME]  44.07,85.98 0 bottom
JP240  STAND-OFF  [STAND-OFF]  43.18,90.68 0 top
JP241  [1X03]  53.85,80.52 0 bottom
JP242  LOGO-SFESK  [SFE-LOGO-FLAME]  52.2,85.98 0 bottom
JP243  STAND-OFF  [STAND-OFF]  51.31,90.68 0 top
JP244  [1X03]  61.98,80.52 0 bottom
JP245  LOGO-SFESK  [SFE-LOGO-FLAME]  60.33,85.98 0 bottom
JP246  STAND-OFF  [STAND-OFF]  59.44,90.68 0 top
JP247  [1X03]  70.1,80.52 0 bottom
JP248  LOGO-SFESK  [SFE-LOGO-FLAME]  68.45,85.98 0 bottom
JP249  STAND-OFF  [STAND-OFF]  67.56,90.68 0 top
JP250  [1X03]  78.23,80.52 0 bottom
JP251  LOGO-SFESK  [SFE-LOGO-FLAME]  76.58,85.98 0 bottom
JP252  STAND-OFF  [STAND-OFF]  75.69,90.68 0 top
JP253  [1X03]  86.36,80.52 0 bottom
JP254  LOGO-SFESK  [SFE-LOGO-FLAME]  84.71,85.98 0 bottom
JP255  STAND-OFF  [STAND-OFF]  83.82,90.68 0 top
JP256  [1X03]  94.49,80.52 0 bottom
JP257  LOGO-SFESK  [SFE-LOGO-FLAME]  92.84,85.98 0 bottom
JP258  STAND-OFF  [STAND-OFF]  91.95,90.68 0 top
JP259  [1X03]  102.62,80.52 0 bottom
JP260  LOGO-SFESK  [SFE-LOGO-FLAME]  100.97,85.98 0 bottom
JP261  STAND-OFF  [STAND-OFF]  100.08,90.68 0 top
JP262  [1X03]  110.74,80.52 0 bottom
JP263  LOGO-SFESK  [SFE-LOGO-FLAME]  109.09,85.98 0 bottom
JP264  STAND-OFF  [STAND-OFF]  108.2,90.68 0 top
JP265  [1X03]  118.87,80.52 0 bottom
JP266  LOGO-SFESK  [SFE-LOGO-FLAME]  117.22,85.98 0 bottom
JP267  STAND-OFF  [STAND-OFF]  116.33,90.68 0 top
JP268  [1X03]  127,80.52 0 bottom
JP269  LOGO-SFESK  [SFE-LOGO-FLAME]  125.35,85.98 0 bottom
JP270  STAND-OFF  [STAND-OFF]  124.46,90.68 0 top
JP271  [1X03]  135.13,8.13 0 bottom
JP272  LOGO-SFESK  [SFE-LOGO-FLAME]  133.48,13.59 0 bottom
JP273  STAND-OFF  [STAND-OFF]  132.59,18.29 0 top
JP274  [1X03]  135.13,22.61 0 bottom
JP275  LOGO-SFESK  [SFE-LOGO-FLAME]  133.48,28.07 0 bottom
JP276  STAND-OFF  [STAND-OFF]  132.59,32.77 0 top
JP277  [1X03]  135.13,37.08 0 bottom
JP278  LOGO-SFESK  [SFE-LOGO-FLAME]  133.48,42.55 0 bottom
JP279  STAND-OFF  [STAND-OFF]  132.59,47.24 0 top
JP280  [1X03]  135.13,51.56 0 bottom
JP281  LOGO-SFESK  [SFE-LOGO-FLAME]  133.48,57.02 0 bottom
JP282  STAND-OFF  [STAND-OFF]  132.59,61.72 0 top
JP283  [1X03]  135.13,66.04 0 bottom
JP284  LOGO-SFESK  [SFE-LOGO-FLAME]  133.48,71.5 0 bottom
JP285  STAND-OFF  [STAND-OFF]  132.59,76.2 0 top
JP286  [1X03]  135.13,80.52 0 bottom
JP287  LOGO-SFESK  [SFE-LOGO-FLAME]  133.48,85.98 0 bottom
JP288  STAND-OFF  [STAND-OFF]  132.59,90.68 0 top
R1  100  [0402-RES]  13.21,10.67 180 top
R2  220  [0402-RES]  8.13,10.67 180 top
R3  100  [0402-RES]  21.34,10.67 180 top
R4  220  [0402-RES]  16.26,10.67 180 top
R5  100  [0402-RES]  29.46,10.67 180 top
R6  220  [0402-RES]  24.38,10.67 180 top
R7  100  [0402-RES]  37.59,10.67 180 top
R8  220  [0402-RES]  32.51,10.67 180 top
R9  100  [0402-RES]  45.72,10.67 180 top
R10  220  [0402-RES]  40.64,10.67 180 top
R11  100  [0402-RES]  53.85,10.67 180 top
R12  220  [0402-RES]  48.77,10.67 180 top
R13  100  [0402-RES]  61.98,10.67 180 top
R14  220  [0402-RES]  56.9,10.67 180 top
R15  100  [0402-RES]  70.1,10.67 180 top
R16  220  [0402-RES]  65.02,10.67 180 top
R17  100  [0402-RES]  78.23,10.67 180 top
R18  220  [0402-RES]  73.15,10.67 180 top
R19  100  [0402-RES]  86.36,10.67 180 top
R20  220  [0402-RES]  81.28,10.67 180 top
R21  100  [0402-RES]  94.49,10.67 180 top
R22  220  [0402-RES]  89.41,10.67 180 top
R23  100  [0402-RES]  102.62,10.67 180 top
R24  220  [0402-RES]  97.54,10.67 180 top
R25  100  [0402-RES]  110.74,10.67 180 top
R26  220  [0402-RES]  105.66,10.67 180 top
R27  100  [0402-RES]  118.87,10.67 180 top
R28  220  [0402-RES]  113.79,10.67 180 top
R29  100  [0402-RES]  127,10.67 180 top
R30  220  [0402-RES]  121.92,10.67 180 top
R31  100  [0402-RES]  13.21,25.15 180 top
R32  220  [0402-RES]  8.13,25.15 180 top
R33  100  [0402-RES]  21.34,25.15 180 top
R34  220  [0402-RES]  16.26,25.15 180 top
R35  100  [0402-RES]  29.46,25.15 180 top
R36  220  [0402-RES]  24.38,25.15 180 top
R37  100  [0402-RES]  37.59,25.15 180 top
R38  220  [0402-RES]  32.51,25.15 180 top
R39  100  [0402-RES]  45.72,25.15 180 top
R40  220  [0402-RES]  40.64,25.15 180 top
R41  100  [0402-RES]  53.85,25.15 180 top
R42  220  [0402-RES]  48.77,25.15 180 top
R43  100  [0402-RES]  61.98,25.15 180 top
R44  220  [0402-RES]  56.9,25.15 180 top
R45  100  [0402-RES]  70.1,25.15 180 top
R46  220  [0402-RES]  65.02,25.15 180 top
R47  100  [0402-RES]  78.23,25.15 180 top
R48  220  [0402-RES]  73.15,25.15 180 top
R49  100  [0402-RES]  86.36,25.15 180 top
R50  220  [0402-RES]  81.28,25.15 180 top
R51  100  [0402-RES]  94.49,25.15 180 top
R52  220  [0402-RES]  89.41,25.15 180 top
R53  100  [0402-RES]  102.62,25.15 180 top
R54  220  [0402-RES]  97.54,25.15 180 top
R55  100  [0402-RES]  110.74,25.15 180 top
R56  220  [0402-RES]  105.66,25.15 180 top
R57  100  [0402-RES]  118.87,25.15 180 top
R58  220  [0402-RES]  113.79,25.15 180 top
R59  100  [0402-RES]  127,25.15 180 top
R60  220  [0402-RES]  121.92,25.15 180 top
R61  100  [0402-RES]  13.21,39.62 180 top
R62  220  [0402-RES]  8.13,39.62 180 top
R63  100  [0402-RES]  21.34,39.62 180 top
R64  220  [0402-RES]  16.26,39.62 180 top
R65  100  [0402-RES]  29.46,39.62 180 top
R66  220  [0402-RES]  24.38,39.62 180 top
R67  100  [0402-RES]  37.59,39.62 180 top
R68  220  [0402-RES]  32.51,39.62 180 top
R69  100  [0402-RES]  45.72,39.62 180 top
R70  220  [0402-RES]  40.64,39.62 180 top
R71  100  [0402-RES]  53.85,39.62 180 top
R72  220  [0402-RES]  48.77,39.62 180 top
R73  100  [0402-RES]  61.98,39.62 180 top
R74  220  [0402-RES]  56.9,39.62 180 top
R75  100  [0402-RES]  70.1,39.62 180 top
R76  220  [0402-RES]  65.02,39.62 180 top
R77  100  [0402-RES]  78.23,39.62 180 top
R78  220  [0402-RES]  73.15,39.62 180 top
R79  100  [0402-RES]  86.36,39.62 180 top
R80  220  [0402-RES]  81.28,39.62 180 top
R81  100  [0402-RES]  94.49,39.62 180 top
R82  220  [0402-RES]  89.41,39.62 180 top
R83  100  [0402-RES]  102.62,39.62 180 top
R84  220  [0402-RES]  97.54,39.62 180 top
R85  100  [0402-RES]  110.74,39.62 180 top
R86  220  [0402-RES]  105.66,39.62 180 top
R87  100  [0402-RES]  118.87,39.62 180 top
R88  220  [0402-RES]  113.79,39.62 180 top
R89  100  [0402-RES]  127,39.62 180 top
R90  220  [0402-RES]  121.92,39.62 180 top
R91  100  [0402-RES]  13.21,54.1 180 top
R92  220  [0402-RES]  8.13,54.1 180 top
R93  100  [0402-RES]  21.34,54.1 180 top
R94  220  [0402-RES]  16.26,54.1 180 top
R95  100  [0402-RES]  29.46,54.1 180 top
R96  220  [0402-RES]  24.38,54.1 180 top
R97  100  [0402-RES]  37.59,54.1 180 top
R98  220  [0402-RES]  32.51,54.1 180 top
R99  100  [0402-RES]  45.72,54.1 180 top
R100  220  [0402-RES]  40.64,54.1 180 top
R101  100  [0402-RES]  53.85,54.1 180 top
R102  220  [0402-RES]  48.77,54.1 180 top
R103  100  [0402-RES]  61.98,54.1 180 top
R104  220  [0402-RES]  56.9,54.1 180 top
R105  100  [0402-RES]  70.1,54.1 180 top
R106  220  [0402-RES]  65.02,54.1 180 top
R107  100  [0402-RES]  78.23,54.1 180 top
R108  220  [0402-RES]  73.15,54.1 180 top
R109  100  [0402-RES]  86.36,54.1 180 top
R110  220  [0402-RES]  81.28,54.1 180 top
R111  100  [0402-RES]  94.49,54.1 180 top
R112  220  [0402-RES]  89.41,54.1 180 top
R113  100  [0402-RES]  102.62,54.1 180 top
R114  220  [0402-RES]  97.54,54.1 180 top
R115  100  [0402-RES]  110.74,54.1 180 top
R116  220  [0402-RES]  105.66,54.1 180 top
R117  100  [0402-RES]  118.87,54.1 180 top
R118  220  [0402-RES]  113.79,54.1 180 top
R119  100  [0402-RES]  127,54.1 180 top
R120  220  [0402-RES]  121.92,54.1 180 top
R121  100  [0402-RES]  13.21,68.58 180 top
R122  220  [0402-RES]  8.13,68.58 180 top
R123  100  [0402-RES]  21.34,68.58 180 top
R124  220  [0402-RES]  16.26,68.58 180 top
R125  100  [0402-RES]  29.46,68.58 180 top
R126  220  [0402-RES]  24.38,68.58 180 top
R127  100  [0402-RES]  37.59,68.58 180 top
R128  220  [0402-RES]  32.51,68.58 180 top
R129  100  [0402-RES]  45.72,68.58 180 top
R130  220  [0402-RES]  40.64,68.58 180 top
R131  100  [0402-RES]  53.85,68.58 180 top
R132  220  [0402-RES]  48.77,68.58 180 top
R133  100  [0402-RES]  61.98,68.58 180 top
R134  220  [0402-RES]  56.9,68.58 180 top
R135  100  [0402-RES]  70.1,68.58 180 top
R136  220  [0402-RES]  65.02,68.58 180 top
R137  100  [0402-RES]  78.23,68.58 180 top
R138  220  [0402-RES]  73.15,68.58 180 top
R139  100  [0402-RES]  86.36,68.58 180 top
R140  220  [0402-RES]  81.28,68.58 180 top
R141  100  [0402-RES]  94.49,68.58 180 top
R142  220  [0402-RES]  89.41,68.58 180 top
R143  100  [0402-RES]  102.62,68.58 180 top
R144  220  [0402-RES]  97.54,68.58 180 top
R145  100  [0402-RES]  110.74,68.58 180 top
R146  220  [0402-RES]  105.66,68.58 180 top
R147  100  [0402-RES]  118.87,68.58 180 top
R148  220  [0402-RES]  113.79,68.58 180 top
R149  100  [0402-RES]  127,68.58 180 top
R150  220  [0402-RES]  121.92,68.58 180 top
R151  100  [0402-RES]  13.21,83.06 180 top
R152  220  [0402-RES]  8.13,83.06 180 top
R153  100  [0402-RES]  21.34,83.06 180 top
R154  220  [0402-RES]  16.26,83.06 180 top
R155  100  [0402-RES]  29.46,83.06 180 top
R156  220  [0402-RES]  24.38,83.06 180 top
R157  100  [0402-RES]  37.59,83.06 180 top
R158  220  [0402-RES]  32.51,83.06 180 top
R159  100  [0402-RES]  45.72,83.06 180 top
R160  220  [0402-RES]  40.64,83.06 180 top
R161  100  [0402-RES]  53.85,83.06 180 top
R162  220  [0402-RES]  48.77,83.06 180 top
R163  100  [0402-RES]  61.98,83.06 180 top
R164  220  [0402-RES]  56.9,83.06 180 top
R165  100  [0402-RES]  70.1,83.06 180 top
R166  220  [0402-RES]  65.02,83.06 180 top
R167  100  [0402-RES]  78.23,83.06 180 top
R168  220  [0402-RES]  73.15,83.06 180 top
R169  100  [0402-RES]  86.36,83.06 180 top
R170  220  [0402-RES]  81.28,83.06 180 top
R171  100  [0402-RES]  94.49,83.06 180 top
R172  220  [0402-RES]  89.41,83.06 180 top
R173  100  [0402-RES]  102.62,83.06 180 top
R174  220  [0402-RES]  97.54,83.06 180 top
R175  100  [0402-RES]  110.74,83.06 180 top
R176  220  [0402-RES]  105.66,83.06 180 top
R177  100  [0402-RES]  118.87,83.06 180 top
R178  220  [0402-RES]  113.79,83.06 180 top
R179  100  [0402-RES]  127,83.06 180 top
R180  220  [0402-RES]  121.92,83.06 180 top
R181  100  [0402-RES]  135.13,10.67 180 top
R182  220  [0402-RES]  130.05,10.67 180 top
R183  100  [0402-RES]  135.13,25.15 180 top
R184  220  [0402-RES]  130.05,25.15 180 top
R185  100  [0402-RES]  135.13,39.62 180 top
R186  220  [0402-RES]  130.05,39.62 180 top
R187  100  [0402-RES]  135.13,54.1 180 top
R188  220  [0402-RES]  130.05,54.1 180 top
R189  100  [0402-RES]  135.13,68.58 180 top
R190  220  [0402-RES]  130.05,68.58 180 top
R191  100  [0402-RES]  135.13,83.06 180 top
R192  220  [0402-RES]  130.05,83.06 180 top
U1  QRE1113  [QRE1113]  10.67,13.21 180 top
U2  QRE1113  [QRE1113]  18.8,13.21 180 top
U3  QRE1113  [QRE1113]  26.92,13.21 180 top
U4  QRE1113  [QRE1113]  35.05,13.21 180 top
U5  QRE1113  [QRE1113]  43.18,13.21 180 top
U6  QRE1113  [QRE1113]  51.31,13.21 180 top
U7  QRE1113  [QRE1113]  59.44,13.21 180 top
U8  QRE1113  [QRE1113]  67.56,13.21 180 top
U9  QRE1113  [QRE1113]  75.69,13.21 180 top
U10  QRE1113  [QRE1113]  83.82,13.21 180 top
U11  QRE1113  [QRE1113]  91.95,13.21 180 top
U12  QRE1113  [QRE1113]  100.08,13.21 180 top
U13  QRE1113  [QRE1113]  108.2,13.21 180 top
U14  QRE1113  [QRE1113]  116.33,13.21 180 top
U15  QRE1113  [QRE1113]  124.46,13.21 180 top
U16  QRE1113  [QRE1113]  10.67,27.69 180 top
U17  QRE1113  [QRE1113]  18.8,27.69 180 top
U18  QRE1113  [QRE1113]  26.92,27.69 180 top
U19  QRE1113  [QRE1113]  35.05,27.69 180 top
U20  QRE1113  [QRE1113]  43.18,27.69 180 top
U21  QRE1113  [QRE1113]  51.31,27.69 180 top
U22  QRE1113  [QRE1113]  59.44,27.69 180 top
U23  QRE1113  [QRE1113]  67.56,27.69 180 top
U24  QRE1113  [QRE1113]  75.69,27.69 180 top
U25  QRE1113  [QRE1113]  83.82,27.69 180 top
U26  QRE1113  [QRE1113]  91.95,27.69 180 top
U27  QRE1113  [QRE1113]  100.08,27.69 180 top
U28  QRE1113  [QRE1113]  108.2,27.69 180 top
U29  QRE1113  [QRE1113]  116.33,27.69 180 top
U30  QRE1113  [QRE1113]  124.46,27.69 180 top
U31  QRE1113  [QRE1113]  10.67,42.16 180 top
U32  QRE1113  [QRE1113]  18.8,42.16 180 top
U33  QRE1113  [QRE1113]  26.92,42.16 180 top
U34  QRE1113  [QRE1113]  35.05,42.16 180 top
U35  QRE1113  [QRE1113]  43.18,42.16 180 top
U36  QRE1113  [QRE1113]  51.31,42.16 180 top
U37  QRE1113  [QRE1113]  59.44,42.16 180 top
U38  QRE1113  [QRE1113]  67.56,42.16 180 top
U39  QRE1113  [QRE1113]  75.69,42.16 180 top
U40  QRE1113  [QRE1113]  83.82,42.16 180 top
U41  QRE1113  [QRE1113]  91.95,42.16 180 top
U42  QRE1113  [QRE1113]  100.08,42.16 180 top
U43  QRE1113  [QRE1113]  108.2,42.16 180 top
U44  QRE1113  [QRE1113]  116.33,42.16 180 top
U45  QRE1113  [QRE1113]  124.46,42.16 180 top
U46  QRE1113  [QRE1113]  10.67,56.64 180 top
U47  QRE1113  [QRE1113]  18.8,56.64 180 top
U48  QRE1113  [QRE1113]  26.92,56.64 180 top
U49  QRE1113  [QRE1113]  35.05,56.64 180 top
U50  QRE1113  [QRE1113]  43.18,56.64 180 top
U51  QRE1113  [QRE1113]  51.31,56.64 180 top
U52  QRE1113  [QRE1113]  59.44,56.64 180 top
U53  QRE1113  [QRE1113]  67.56,56.64 180 top
U54  QRE1113  [QRE1113]  75.69,56.64 180 top
U55  QRE1113  [QRE1113]  83.82,56.64 180 top
U56  QRE1113  [QRE1113]  91.95,56.64 180 top
U57  QRE1113  [QRE1113]  100.08,56.64 180 top
U58  QRE1113  [QRE1113]  108.2,56.64 180 top
U59  QRE1113  [QRE1113]  116.33,56.64 180 top
U60  QRE1113  [QRE1113]  124.46,56.64 180 top
U61  QRE1113  [QRE1113]  10.67,71.12 180 top
U62  QRE1113  [QRE1113]  18.8,71.12 180 top
U63  QRE1113  [QRE1113]  26.92,71.12 180 top
U64  QRE1113  [QRE1113]  35.05,71.12 180 top
U65  QRE1113  [QRE1113]  43.18,71.12 180 top
U66  QRE1113  [QRE1113]  51.31,71.12 180 top
U67  QRE1113  [QRE1113]  59.44,71.12 180 top
U68  QRE1113  [QRE1113]  67.56,71.12 180 top
U69  QRE1113  [QRE1113]  75.69,71.12 180 top
U70  QRE1113  [QRE1113]  83.82,71.12 180 top
U71  QRE1113  [QRE1113]  91.95,71.12 180 top
U72  QRE1113  [QRE1113]  100.08,71.12 180 top
U73  QRE1113  [QRE1113]  108.2,71.12 180 top
U74  QRE1113  [QRE1113]  116.33,71.12 180 top
U75  QRE1113  [QRE1113]  124.46,71.12 180 top
U76  QRE1113  [QRE1113]  10.67,85.6 180 top
U77  QRE1113  [QRE1113]  18.8,85.6 180 top
U78  QRE1113  [QRE1113]  26.92,85.6 180 top
U79  QRE1113  [QRE1113]  35.05,85.6 180 top
U80  QRE1113  [QRE1113]  43.18,85.6 180 top
U81  QRE1113  [QRE1113]  51.31,85.6 180 top
U82  QRE1113  [QRE1113]  59.44,85.6 180 top
U83  QRE1113  [QRE1113]  67.56,85.6 180 top
U84  QRE1113  [QRE1113]  75.69,85.6 180 top
U85  QRE1113  [QRE1113]  83.82,85.6 180 top
U86  QRE1113  [QRE1113]  91.95,85.6 180 top
U87  QRE1113  [QRE1113]  100.08,85.6 180 top
U88  QRE1113  [QRE1113]  108.2,85.6 180 top
U89  QRE1113  [QRE1113]  116.33,85.6 180 top
U90  QRE1113  [QRE1113]  124.46,85.6 180 top
U91  QRE1113  [QRE1113]  132.59,13.21 180 top
U92  QRE1113  [QRE1113]  132.59,27.69 180 top
U93  QRE1113  [QRE1113]  132.59,42.16 180 top
U94  QRE1113  [QRE1113]  132.59,56.64 180 top
U95  QRE1113  [QRE1113]  132.59,71.12 180 top
U96  QRE1113  [QRE1113]  132.59,85.6 180 top

## Library data of the parts
C1-C96 JP1-JP288 R1-R192 U1-U96 = SparkFun
E$1 = SparkFun-Retired
E$5 E$7 FID1-FID192 = SparkFun-Aesthetics